# EAGLE board eletric (EAGLE 9.6.2)
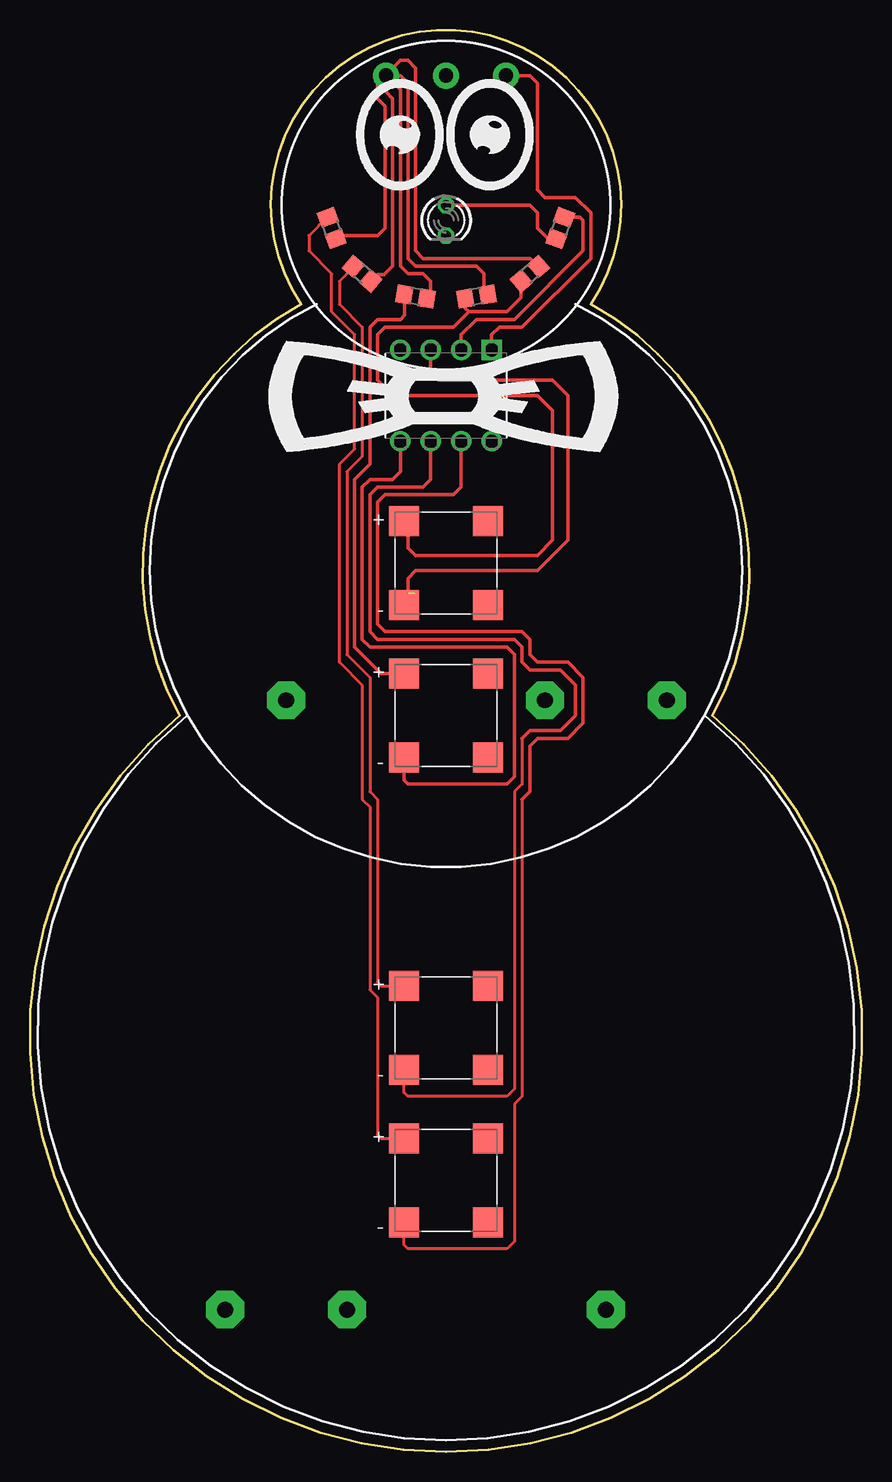
[diagram p0: board, top side]
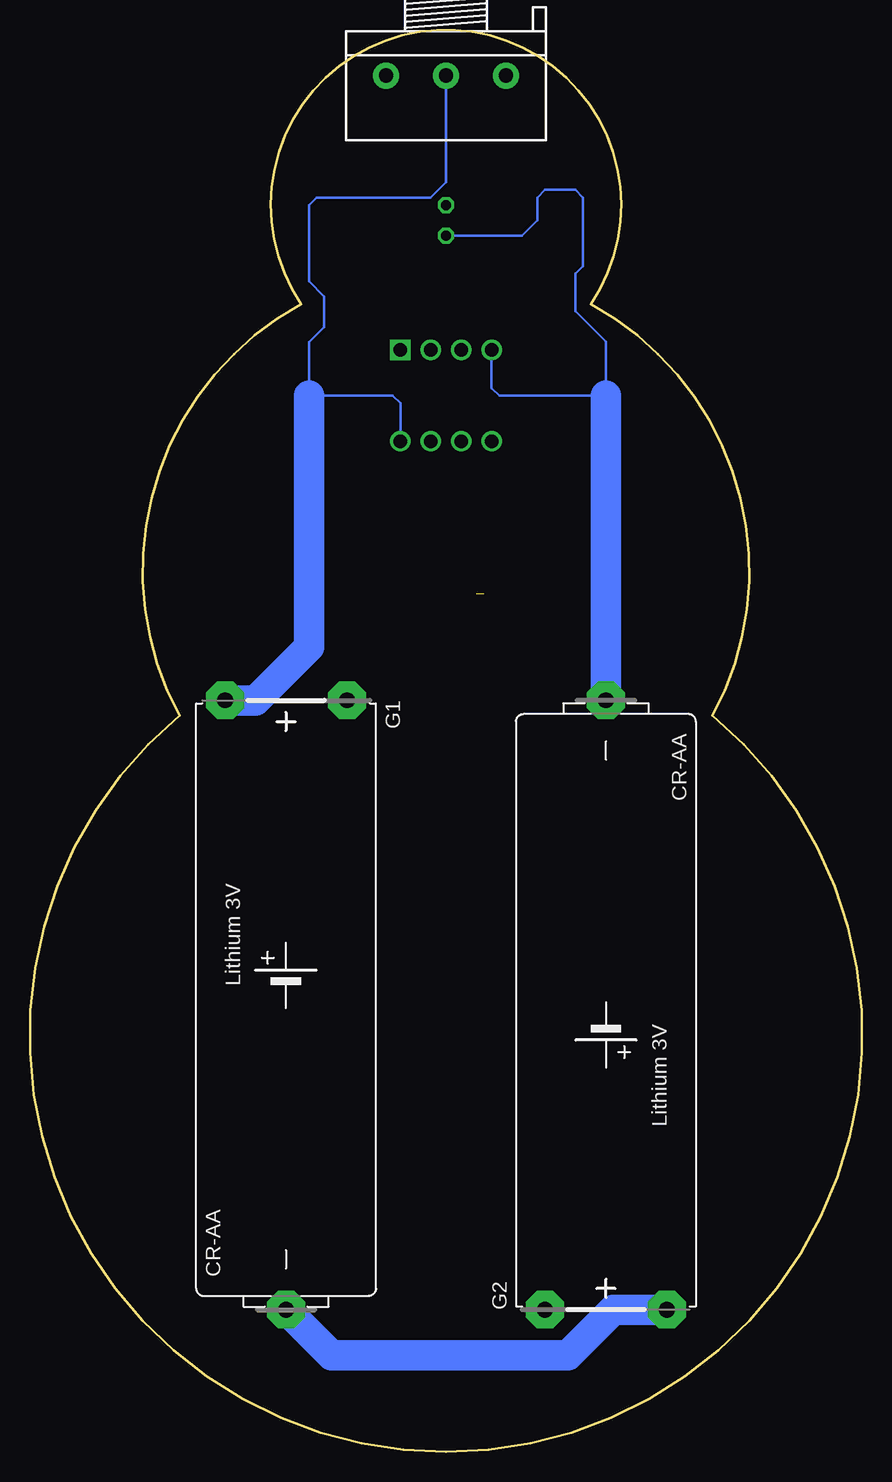
[diagram p1: board, bottom side, seen from below]

Size 69.37 x 118.53 mm. Coordinates in mm from the lower left corner, seen from the top.
Outline: 22.62,95.68 arc-249 46.75,95.68 arc-90 56.91,61.39 arc-280 12.46,61.39 arc-90 22.62,95.68
Copper layers (1*16): Top 0.035mm / dielectric 1.5mm / Bottom 0.035mm
Design rules "default": minimum track width 6mil, minimum drill 0.35mm, track to track 6mil, track to pad 6mil, pad to pad 6mil, via to via 6mil, smd to smd 6mil, copper to edge 40mil, drill to drill 6mil, minimum pad ring 10mil, minimum via ring 8mil, stop-mask expansion 4mil, vias tented up to drill 0mil, thermal gap 10mil

## Footprints (pad centres in the part's own frame; a part is rotated, then mirrored left to right if it is on the bottom)
CRAA = drill 1.321 pad 3.15 octagon: + -25.4,-5.08; +@1 -25.4,5.08; - 25.4,0
LED3MM = drill 0.813 octagon: A -1.27,0; K 1.27,0
CUI_CMT-8530S-SMT = smd 2.5 x 2.5: 1 -3.5,3.5; 2 -3.5,-3.5; N 3.5,3.5; P 3.5,-3.5
3RP/1610N = drill 1.2 pad 2.184: 1 -5,0; 2 0,0; 3 5,0
R0805 = smd 1.3 x 1.5: 1 -0.95,0; 2 0.95,0
DIP254P762X533-8 = drill 1.118 square: 1 -7.62,7.62 | drill 1.118: 2 -7.62,5.08; 3 -7.62,2.54; 4 -7.62,0; 5 0,0; 6 0,2.54; 7 0,5.08; 8 0,7.62

## Placement (x,y rotation side)
G1  CR-AA  [CRAA]  48.02,37.26 270 bottom
G2  CR-AA  [CRAA]  21.35,37.26 90 bottom
LED1  [LED3MM]  34.69,102.66 270 top
LS1  CMT-8530S-SMT  [CUI_CMT-8530S-SMT]  34.69,74.09 180 top
LS2  CMT-8530S-SMT  [CUI_CMT-8530S-SMT]  34.69,22.65 180 top
LS3  CMT-8530S-SMT  [CUI_CMT-8530S-SMT]  34.69,61.39 180 top
LS4  CMT-8530S-SMT  [CUI_CMT-8530S-SMT]  34.69,35.35 180 top
R1  [3RP/1610N]  34.69,114.73 180 bottom
R2  [R0805]  25.16,102.03 110 top
R3  [R0805]  27.7,98.22 140 top
R4  [R0805]  32.15,96.31 170 top
R5  [R0805]  37.23,96.31 190 top
R6  [R0805]  41.67,98.22 220 top
R7  [R0805]  44.21,102.03 250 top
U1  ATTINY85-20PU  [DIP254P762X533-8]  30.88,84.25 270 top

## Library data of the parts
G1 G2 = battery
LED1 = led
LS1-LS4 = CMT-8530S-SMT; AVAILABILITY: Good; CUI_PURCHASE_URL: https://www.cuidevices.com/product/audio/buzzers/audio-transducers/cmt-8530s-smt-tr?utm_source=snapeda.com&utm_medium=referral&utm_campaign=snapedaBOM; DESCRIPTION: 8.5 mm, 3.6 Vo-p, 90 dB, Surface Mount (SMT), Magnetic Audio Transducer Buzzer; MF: CUI Devices; MP: CMT-8530S-SMT-TR; PACKAGE: CUI; PRICE: None; PURCHASE-URL: https://pricing.snapeda.com/search/part/CMT-8530S-SMT-TR/?ref=eda
R1 = pot
R2-R7 = rcl; SPICEPREFIX: R
U1 = ATTINY85-20PU; AVAILABILITY: Good; DESCRIPTION: AVR AVR® ATtiny, Functional Safety (FuSa) Microcontroller IC 8-Bit 20MHz 8KB (4K x 16) FLASH 8-PDIP; MF: Microchip; MP: ATTINY85-20PU; PACKAGE: DIP-8 Microchip; PRICE: None; PURCHASE-URL: https://pricing.snapeda.com/search/part/ATTINY85-20PU/?ref=eda

## Nets
BUZER_HARMONY_1: LS2.N U1.7
BUZER_HARMONY_2: LS4.N U1.6
BUZER_HARMONY_3: LS3.N U1.5
BUZER_MELODY: LS1.N U1.3
GND: G2.- LED1.K U1.4
LED: R7.1 U1.2
N$1: G1.- G2.+
N$2: LS4.P R3.2
N$3: LS2.P R2.2
N$4: LS3.P R4.2
N$5: LED1.A R7.2
N$6: LS1.P R5.2 R6.2
RESET: R1.3 U1.1
VCC: G1.+ R1.2 U1.8
VOLUME: R1.1 R2.1 R3.1 R4.1 R5.1 R6.1

## Tracks (layer width: path | path; a pad name or v marks a point on that pad's centre or on a via)
BUZER_HARMONY_1
  Top 0.254: 41.04,54.4 41.04,29.64 40.4,29 40.4,17.57 39.77,16.94 31.51,16.94 31.19,17.26 LS2.N
  Top 0.305: U1.7 35.96,80.44 35.32,79.8 29.61,79.8 28.97,79.17 28.97,69.01 29.61,68.37 41.04,68.37 41.67,67.74 41.67,66.47 42.31,65.83 44.85,65.83 46.12,64.56 46.12,60.75 44.85,59.48 42.31,59.48 41.67,58.85 41.67,55.04 41.04,54.4
BUZER_HARMONY_2
  Top 0.254: 41.04,59.48 41.04,55.67 40.4,55.04 40.4,30.27 39.77,29.64 31.51,29.64 31.19,29.96 LS4.N
  Top 0.305: U1.6 33.42,81.07 32.78,80.44 28.97,80.44 28.34,79.8 28.34,68.37 28.97,67.74 40.4,67.74 41.04,67.1 41.04,65.83 41.67,65.2 44.21,65.2 45.48,63.93 45.48,61.39 44.21,60.12 41.67,60.12 41.04,59.48
BUZER_HARMONY_3
  Top 0.305: U1.5 30.88,81.71 30.24,81.07 28.34,81.07 27.7,80.44 27.7,67.74 28.34,67.1 39.77,67.1 40.4,66.47 40.4,56.31 39.77,55.67 31.51,55.67 31.19,56 LS3.N 30.88,57.58
BUZER_MELODY  (1 unrouted)
  Top 0.305: LS1.N 32.15,71.55 | U1.3 33.42,89.96 34.05,89.33 43.58,89.33 44.85,88.06 44.85,75.99 42.31,73.45 32.15,73.45 31.51,72.82 31.51,71.55
GND
  Bottom 0.2: U1.4 30.88,88.69 30.24,88.06 21.35,88.06 21.35,92.56 23.9,95.1 23.9,95.88 23.91,95.95 23.89,95.97 23.89,98.22 23.26,98.85 23.26,104.57 23.89,105.2 26.43,105.2 27.07,104.57 27.07,102.66 28.34,101.39 LED1.K
  Bottom 2.54: G2.- 21.35,88.06
LED
  Top 0.305: R7.1 45.86,102.92 46.12,102.66 46.12,100.12 40.4,94.41 37.23,94.41 35.96,93.14 U1.2
N$1
  Bottom 2.54: G2.+ 20.72,11.86 24.53,8.05 44.21,8.05 G1.-
N$2
  Top 0.254: R3.2 26.97,98.76 25.8,97.58 25.8,95.68 27.7,93.77 27.7,82.98 26.43,81.71 26.43,66.47 28.34,64.56 28.34,55.04 28.97,54.4 28.97,39.16 29.28,38.85 LS4.P 30.86,38.53
N$3
  Top 0.254: R2.2 24.78,102.92 23.26,101.39 23.26,100.12 25.16,98.22 25.16,95.04 27.07,93.14 27.07,83.61 25.8,82.34 25.8,65.83 27.7,63.93 27.7,54.4 28.34,53.77 28.34,38.53 28.97,37.89 28.97,26.46 29.28,26.15 LS2.P
N$4
  Top 0.305: R4.2 31.21,94.74 30.88,94.41 28.97,94.41 28.34,93.77 28.34,82.34 27.07,81.07 27.07,67.1 29.28,64.89 LS3.P 30.88,65.2
N$5
  Top 0.305: LED1.A 41.67,103.93 42.31,103.3 42.31,102.03 43.2,101.13 R7.2
N$6
  Top 0.305: 32.15,76.63 LS1.P 31.51,77.26 31.51,75.36 32.15,74.72 42.31,74.72 43.58,75.99 43.58,86.79 42.31,88.06 30.24,88.06 28.97,89.33 28.97,93.14 29.61,93.77 35.32,93.77 36.59,95.04 | R6.2 40.94,96.22 39.77,95.04 36.59,95.04 | 36.59,95.04 36.29,95.34 R5.2
RESET
  Top 0.305: R1.3 41.67,114.73 42.31,114.09 42.31,105.2 42.94,104.57 45.48,104.57 46.75,103.3 46.75,99.49 41.04,93.77 39.13,93.77 38.5,93.14 U1.1
VCC
  Bottom 0.2: R1.2 34.69,105.84 35.96,104.57 45.48,104.57 46.12,103.93 46.12,97.58 44.85,96.31 44.85,93.77 46.12,92.5 46.12,89.33 46.12,88.06 39.13,88.06 38.5,87.42 U1.8
  Bottom 2.54: G1.+ 50.56,62.66 46.12,67.1 46.12,88.06
VOLUME
  Top 0.305: R5.1 37.86,96.78 37.86,98.22 37.23,98.85 32.15,98.85 31.51,99.49 31.51,114.09 30.88,114.73 R1.1 | R1.1 29.69,114.81 30.88,116 31.51,116 32.15,115.36 32.15,100.12 32.78,99.49 41.74,99.49 R6.1 | R4.1 33.42,96.48 33.42,97.58 32.78,98.22 31.51,98.22 30.88,98.85 30.88,113.54 R1.1 | R3.1 28.97,98.15 29.54,98.15 30.24,98.85 30.24,112.82 29.69,113.38 R1.1 | R2.1 25.74,101.39 28.97,101.39 29.61,102.03 29.61,112.19 28.97,112.82 28.97,114.09 29.61,114.73 R1.1